# EAGLE board Swissler_HW2_final (EAGLE 8.1.0)
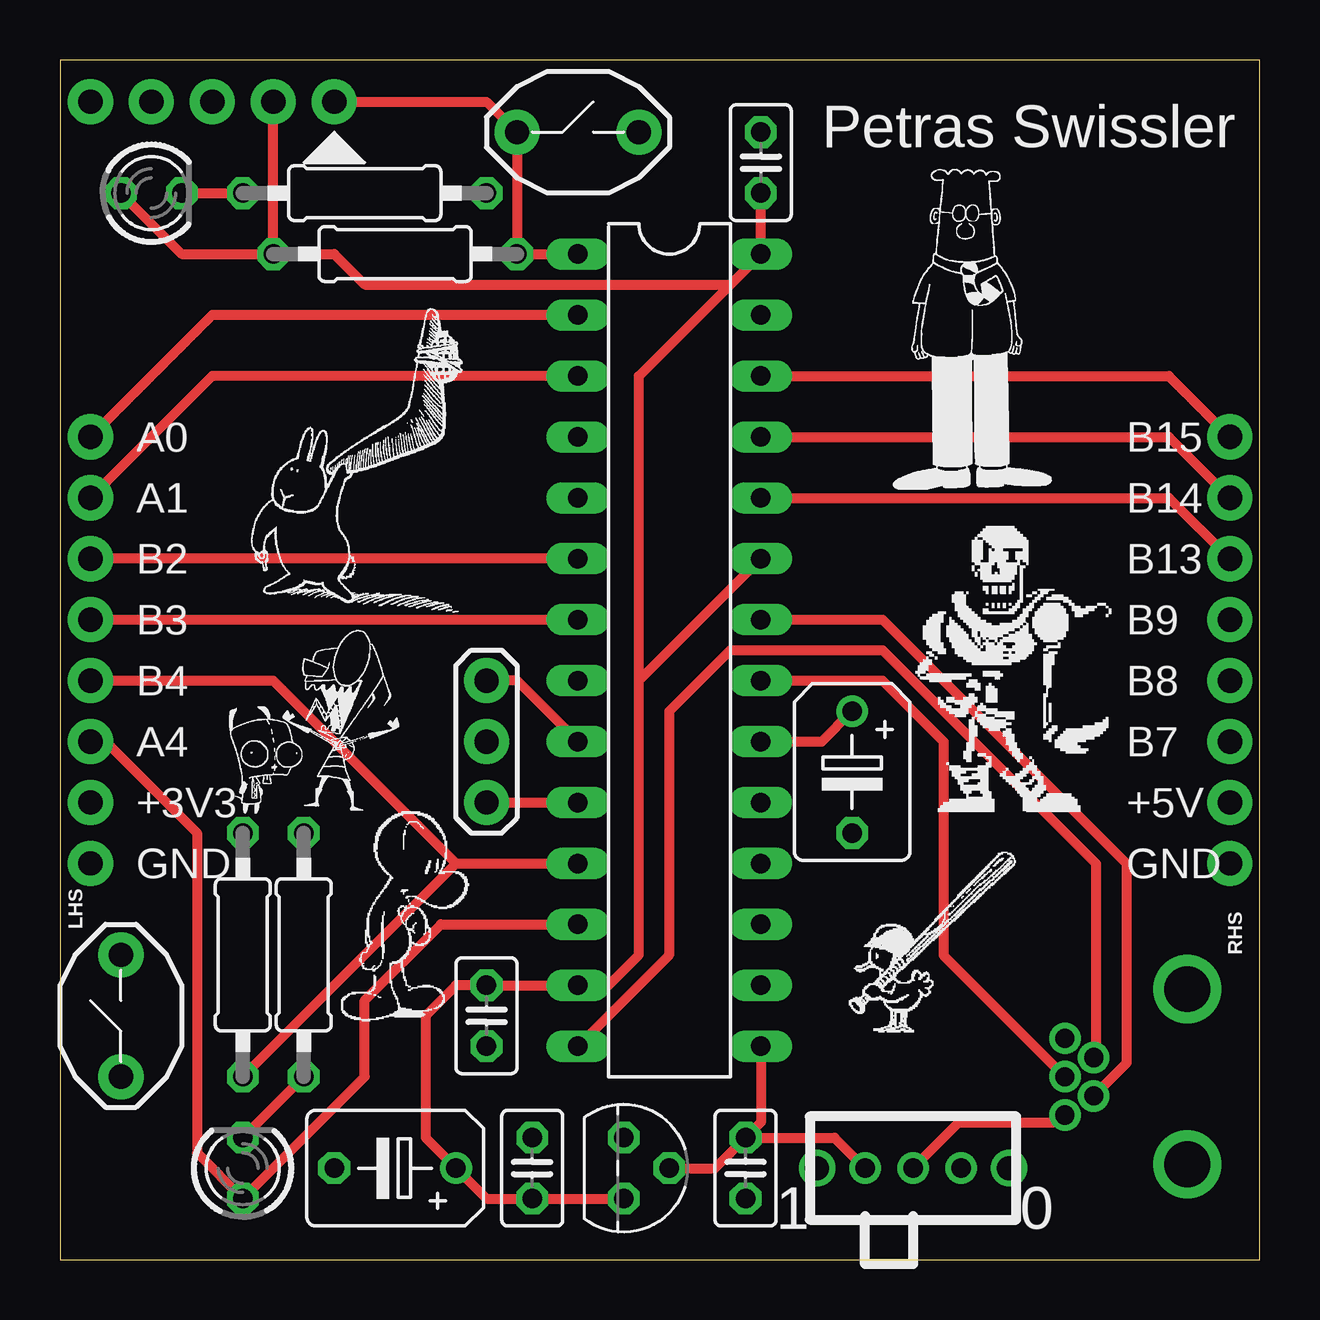
[diagram p0: board, top side]
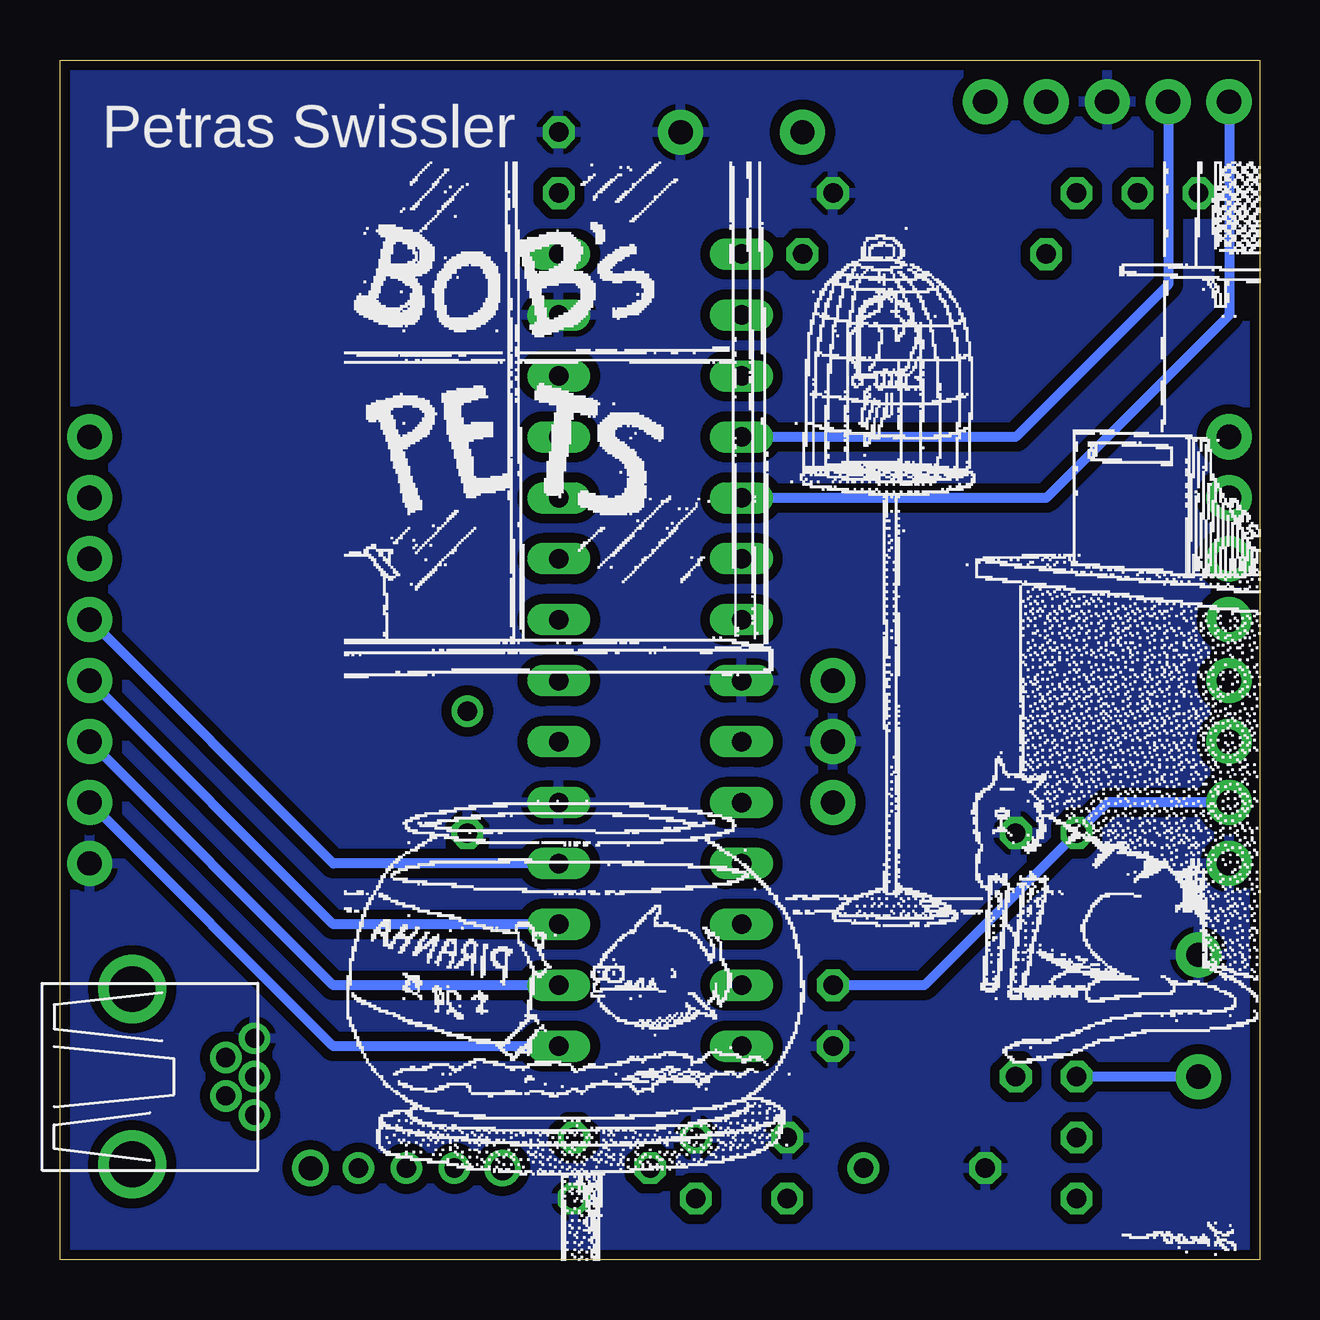
[diagram p1: board, bottom side, seen from below]

Size 50 x 50 mm. Coordinates in mm from the lower left corner, seen from the top.
Outline: 0,0 50,0 50,50 0,50 0,0
Copper layers (1*16): Top 0.035mm / dielectric 1.5mm / Bottom 0.035mm
Design rules "SeeedStudio_2layer_DRU_no_angle_20140221": minimum track width 6mil, minimum drill 12mil, track to track 6mil, track to pad 6mil, pad to pad 6mil, via to via 6mil, smd to smd 0mil, copper to edge 10mil, drill to drill 10mil, minimum pad ring 10mil, minimum via ring 6mil, stop-mask expansion 2mil, vias tented up to drill 100mil, thermal gap 10mil

## Footprints (pad centres in the part's own frame; a part is rotated, then mirrored left to right if it is on the bottom)
C025-025X050 = drill 0.813 octagon: 1 -1.27,0; 2 1.27,0
B45181B = drill 0.813: + -2.54,0 | drill 0.813 octagon: - 2.54,0
USB-MB-H = drill 0.8: D+ 5.1,0; D- 3.9,0.8; GND 5.1,-1.6; ID 3.9,-0.8; VBUS 5.1,1.6 | drill 1.9: P$6 0,-3.65; P$7 0,3.65
LED3MM = drill 0.813 octagon: A -1.27,0; K 1.27,0
1X08 = drill 1.016 pad 1.88: 1 0,0; 2 2.54,0; 3 5.08,0; 4 7.62,0; 5 10.16,0; 6 12.7,0; 7 15.24,0; 8 17.78,0
0207/10 = drill 0.813 octagon: 1 -5.08,0; 2 5.08,0
DIL28-3 = drill 0.813 long: 1 -16.51,-3.81; 2 -13.97,-3.81; 3 -11.43,-3.81; 4 -8.89,-3.81; 5 -6.35,-3.81; 6 -3.81,-3.81; 7 -1.27,-3.81; 8 1.27,-3.81; 9 3.81,-3.81; 10 6.35,-3.81; 11 8.89,-3.81; 12 11.43,-3.81; 13 13.97,-3.81; 14 16.51,-3.81; 15 16.51,3.81; 16 13.97,3.81; 17 11.43,3.81; 18 8.89,3.81; 19 6.35,3.81; 20 3.81,3.81; 21 1.27,3.81; 22 -1.27,3.81; 23 -3.81,3.81; 24 -6.35,3.81; 25 -8.89,3.81; 26 -11.43,3.81; 27 -13.97,3.81; 28 -16.51,3.81
SLIDE = drill 0.8: 1 -2,0; 2 0,0; 3 2,0 | drill 1: P$1 -4,0; P$2 4,0
TO92 = drill 0.813 octagon: 1 -1.27,0; 2 0,1.905; 3 1.27,0
PB = drill 1.016 pad 1.88: 1 -2.54,0; 2 2.54,0
1X05 = drill 1.016 pad 1.88: 1 0,0; 2 2.54,0; 3 5.08,0; 4 7.62,0; 5 10.16,0
OSC = drill 1.016 pad 1.88: 1 -2.54,0; 2 0,0; 3 2.54,0

## Placement (x,y rotation side)
C1  0.1uF  [C025-025X050]  17.78,10.16 270 top
C2  0.1uF  [C025-025X050]  29.21,45.72 90 top
C3  0.1uF  [C025-025X050]  28.57,3.81 270 top
C4  0.1uF  [C025-025X050]  19.68,3.81 90 top
C5  10uF  [B45181B]  33.02,20.32 270 top
C6  10uF  [B45181B]  13.97,3.81 180 top
J1  USB-MB-H  [USB-MB-H]  46.99,7.62 180 top
LED1  RED  [LED3MM]  3.81,44.45 0 top
LED2  GREEN  [LED3MM]  7.62,3.81 90 top
LHS  CONN_08  [1X08]  1.27,16.51 90 top
R1  330  [0207/10]  12.7,44.45 180 top
R2  330  [0207/10]  10.16,12.7 270 top
R3  10k  [0207/10]  13.97,41.91 180 top
R4  10k  [0207/10]  7.62,12.7 270 top
RHS  CONN_08  [1X08]  48.77,16.51 90 top
U$1  PIC32MX250F128B  [DIL28-3]  25.4,25.4 270 top
U$2  ON  [SLIDE]  35.56,3.81 180 top
U$3  MMCP1702  [TO92]  23.5,3.81 270 top
U$4  RESET  [PB]  21.59,46.99 0 top
U$5  USER  [PB]  2.54,10.16 90 top
U$8  PICKIT3  [1X05]  11.43,48.26 180 top
U$9  OSC  [OSC]  17.78,21.59 90 top

## Library data of the parts
C1-C6 J1 LHS R1-R4 RHS U$1-U$5 U$8 U$9 = Swissler_HW2
LED1 LED2 = led

## Nets
+3V3: C1.1 C2.1 C4.1 C6.+ LED1.A LHS.2 R3.2 R4.1 U$1.13 U$1.23 U$1.28 U$3.3 U$8.2
+5V: C3.1 RHS.2 U$1.15 U$2.3 U$3.2
A0: LHS.8 U$1.2
A1: LHS.7 U$1.3
A4/LED: LED2.A LHS.3 U$1.12
B2: LHS.6 U$1.6
B3: LHS.5 U$1.7
B4/USER: LHS.4 R4.2 U$1.11 U$5.1
B7: RHS.3 U$1.16
B8: RHS.4 U$1.17
B9: RHS.5 U$1.18
B13: RHS.6 U$1.24
B14: RHS.7 U$1.25
B15: RHS.8 U$1.26
D+: J1.D+ U$1.21
D-: J1.D- U$1.22
GND: C1.2 C2.2 C3.2 C4.2 C5.- C6.- J1.GND LHS.1 R1.1 R2.1 RHS.1 U$1.8 U$1.19 U$1.27 U$3.1 U$4.2 U$5.2 U$8.3 U$9.2
MCLR: R3.1 U$1.1 U$4.1 U$8.1
N$4: LED2.K R2.2
N$5: LED1.K R1.2
OSC1: U$1.9 U$9.3
OSC2: U$1.10 U$9.1
PGC: U$1.5 U$8.5
PGD: U$1.4 U$8.4
USBID: J1.ID U$1.14
VBUS: J1.VBUS U$2.2
VCAP: C5.+ U$1.20

## Tracks (layer width: path | path; a pad name or v marks a point on that pad's centre or on a via)
+3V3
  Top 0.406: U$3.3 C4.1 17.78,2.54 C6.+ 15.24,5.08 15.24,10.16 16.51,11.43 C1.1 U$1.13 22.86,11.43 24.13,12.7 24.13,24.13 | 24.13,24.13 U$1.23 | 24.13,24.13 24.13,36.83 27.94,40.64 | 27.94,40.64 U$1.28 C2.1 | R3.2 U$8.2 | R3.2 11.43,41.91 12.7,40.64 27.94,40.64 | LED1.A 5.08,41.91 R3.2
  Bottom 0.406: LHS.2 6.35,19.05 R4.1 13.97,11.43 C1.1
+5V
  Top 0.406: U$3.2 27.3,3.81 C3.1 | C3.1 32.29,5.08 U$2.3 | U$1.15 29.21,5.71 C3.1
  Bottom 0.406: RHS.2 38.61,8.89 U$1.15
A0
  Top 0.406: U$1.2 6.35,39.37 LHS.8
A1
  Top 0.406: U$1.3 6.35,36.83 LHS.7
A4/LED
  Top 0.406: U$1.12 15.88,13.97 12.7,10.79 12.7,7.62 LED2.A 5.71,4.45 5.71,17.78 1.91,21.59 LHS.3
B2
  Top 0.406: U$1.6 LHS.6
B3
  Top 0.406: LHS.5 U$1.7
B4/USER
  Top 0.406: 16.51,16.51 U$1.11 | 16.51,16.51 R4.2 | LHS.4 8.89,24.13 16.51,16.51
  Bottom 0.406: U$5.1 R4.2
B7
  Bottom 0.406: U$1.16 38.61,11.43 RHS.3
B8
  Bottom 0.406: U$1.17 38.61,13.97 RHS.4
B9
  Bottom 0.406: U$1.18 38.61,16.51 RHS.5
B13
  Top 0.406: U$1.24 46.23,31.75 RHS.6
B14
  Top 0.406: U$1.25 46.23,34.29 RHS.7
B15
  Top 0.406: U$1.26 46.23,36.83 RHS.8
D+
  Top 0.406: U$1.21 34.29,24.13 36.83,21.59 36.83,12.68 J1.D+
D-
  Top 0.406: U$1.22 34.29,26.67 44.45,16.51 44.45,8.18 J1.D-
GND
  pour Bottom (isolate 0.406): 0,50.8 -2.54,50.8 -2.54,-2.54 50.8,-2.54 50.8,50.8
MCLR
  Top 0.406: U$1.1 R3.1 U$4.1 17.78,48.26 U$8.1
N$4
  Top 0.406: LED2.K R2.2
N$5
  Top 0.406: LED1.K R1.2
OSC1
  Top 0.406: U$9.3 19.05,24.13 U$1.9
OSC2
  Top 0.406: U$9.1 U$1.10
PGC
  Bottom 0.406: U$8.5 1.27,39.37 8.89,31.75 U$1.5
PGD
  Bottom 0.406: U$8.4 3.81,40.64 10.16,34.29 U$1.4
USBID
  Top 0.406: U$1.14 25.4,12.7 25.4,22.86 27.94,25.4 34.29,25.4 43.18,16.51 43.18,8.51 J1.ID
VBUS
  Top 0.406: U$2.2 37.47,5.71 41.59,5.71 J1.VBUS
VCAP
  Top 0.406: U$1.20 31.75,21.59 C5.+

## Text on the board
tPlace: Petras Swissler
bPlace: Petras Swissler
_tsilk: A0 | B15 | A1 | B14 | B2 | B13 | B3 | B9 | B4 | B8 | A4 | B7 | +3V3 | +5V | GND | GND | 1 | 0